# Altium PCB LCD Breakout.PcbDoc
Units mil, origin at the board's own origin, x right, y up, seen from the top; angles counter-clockwise.
Board outline 1225 x 1575 mil, 2 copper layers (Top Layer, Bottom Layer); 11 components, 50 nets, 91 pads, 3 vias.
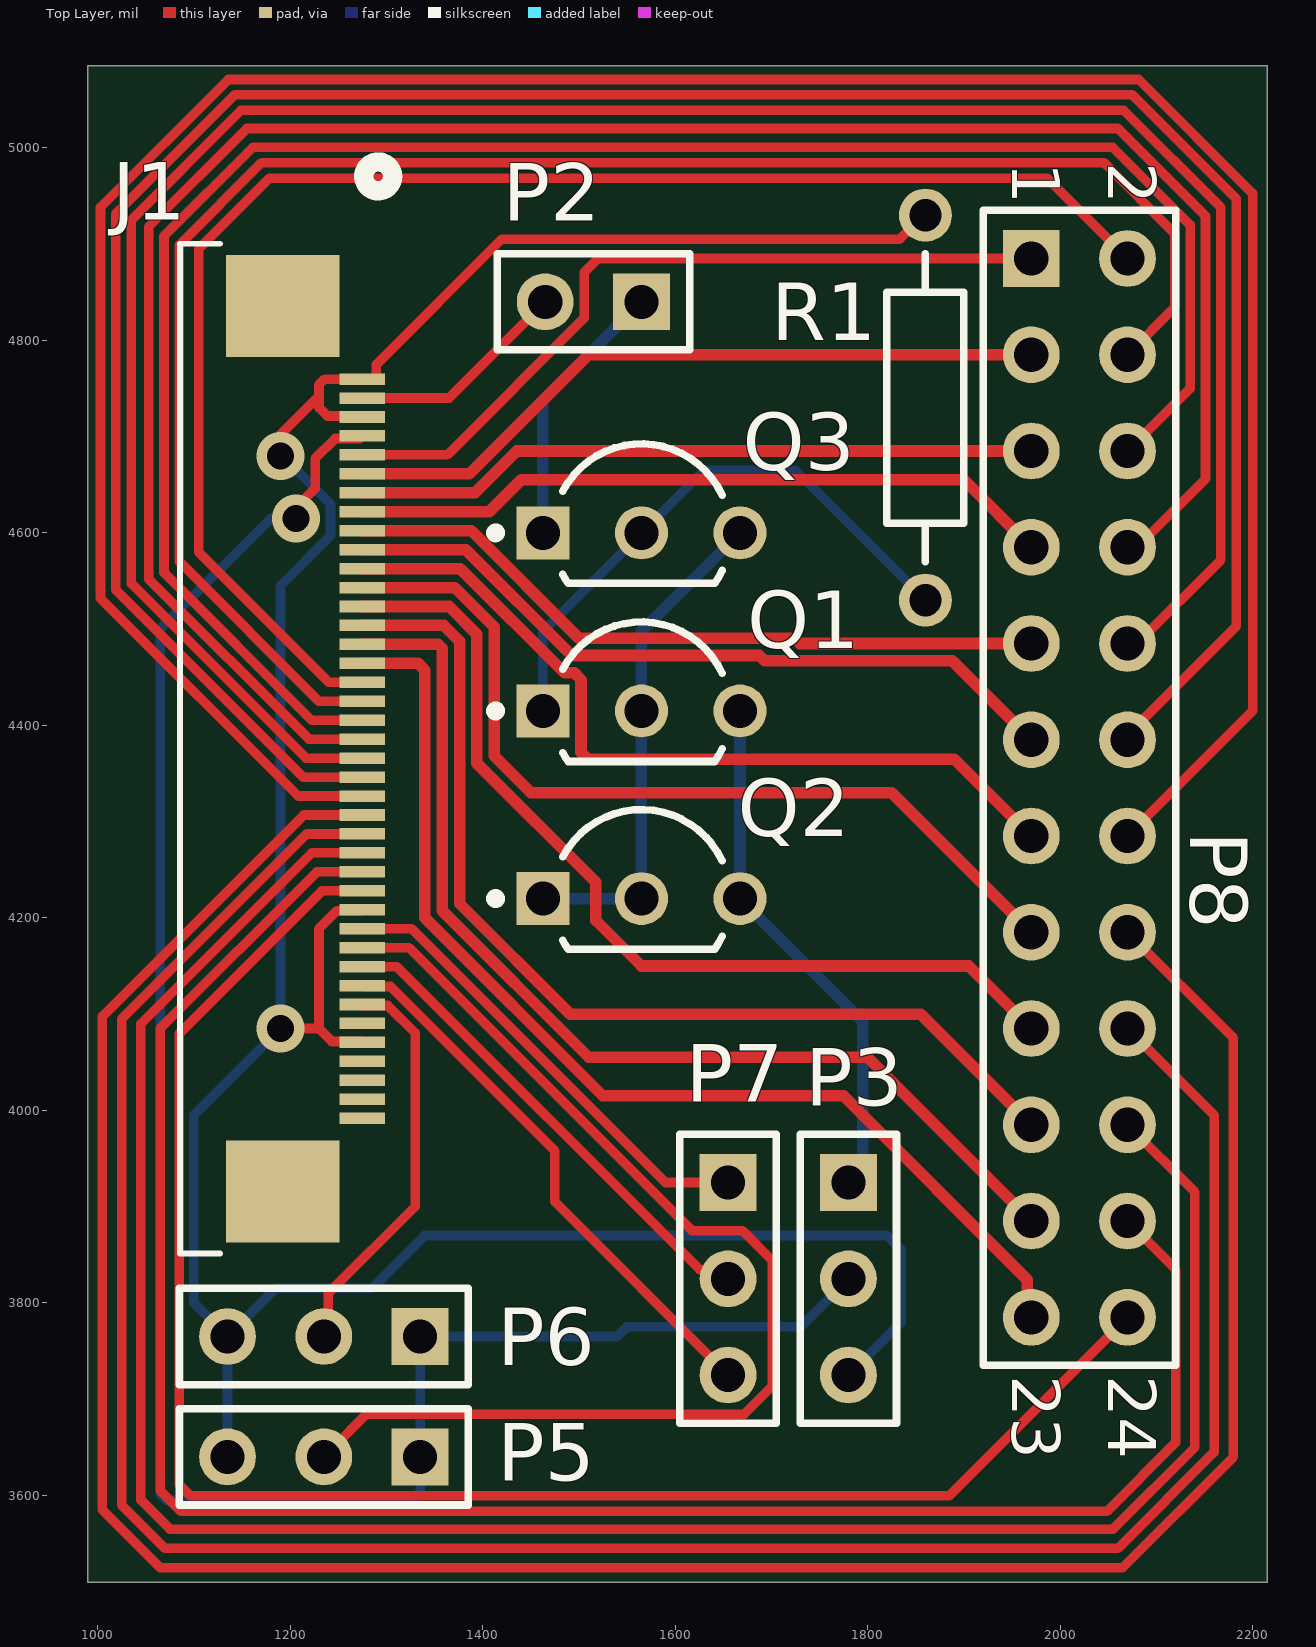
[diagram p0: Top Layer view]
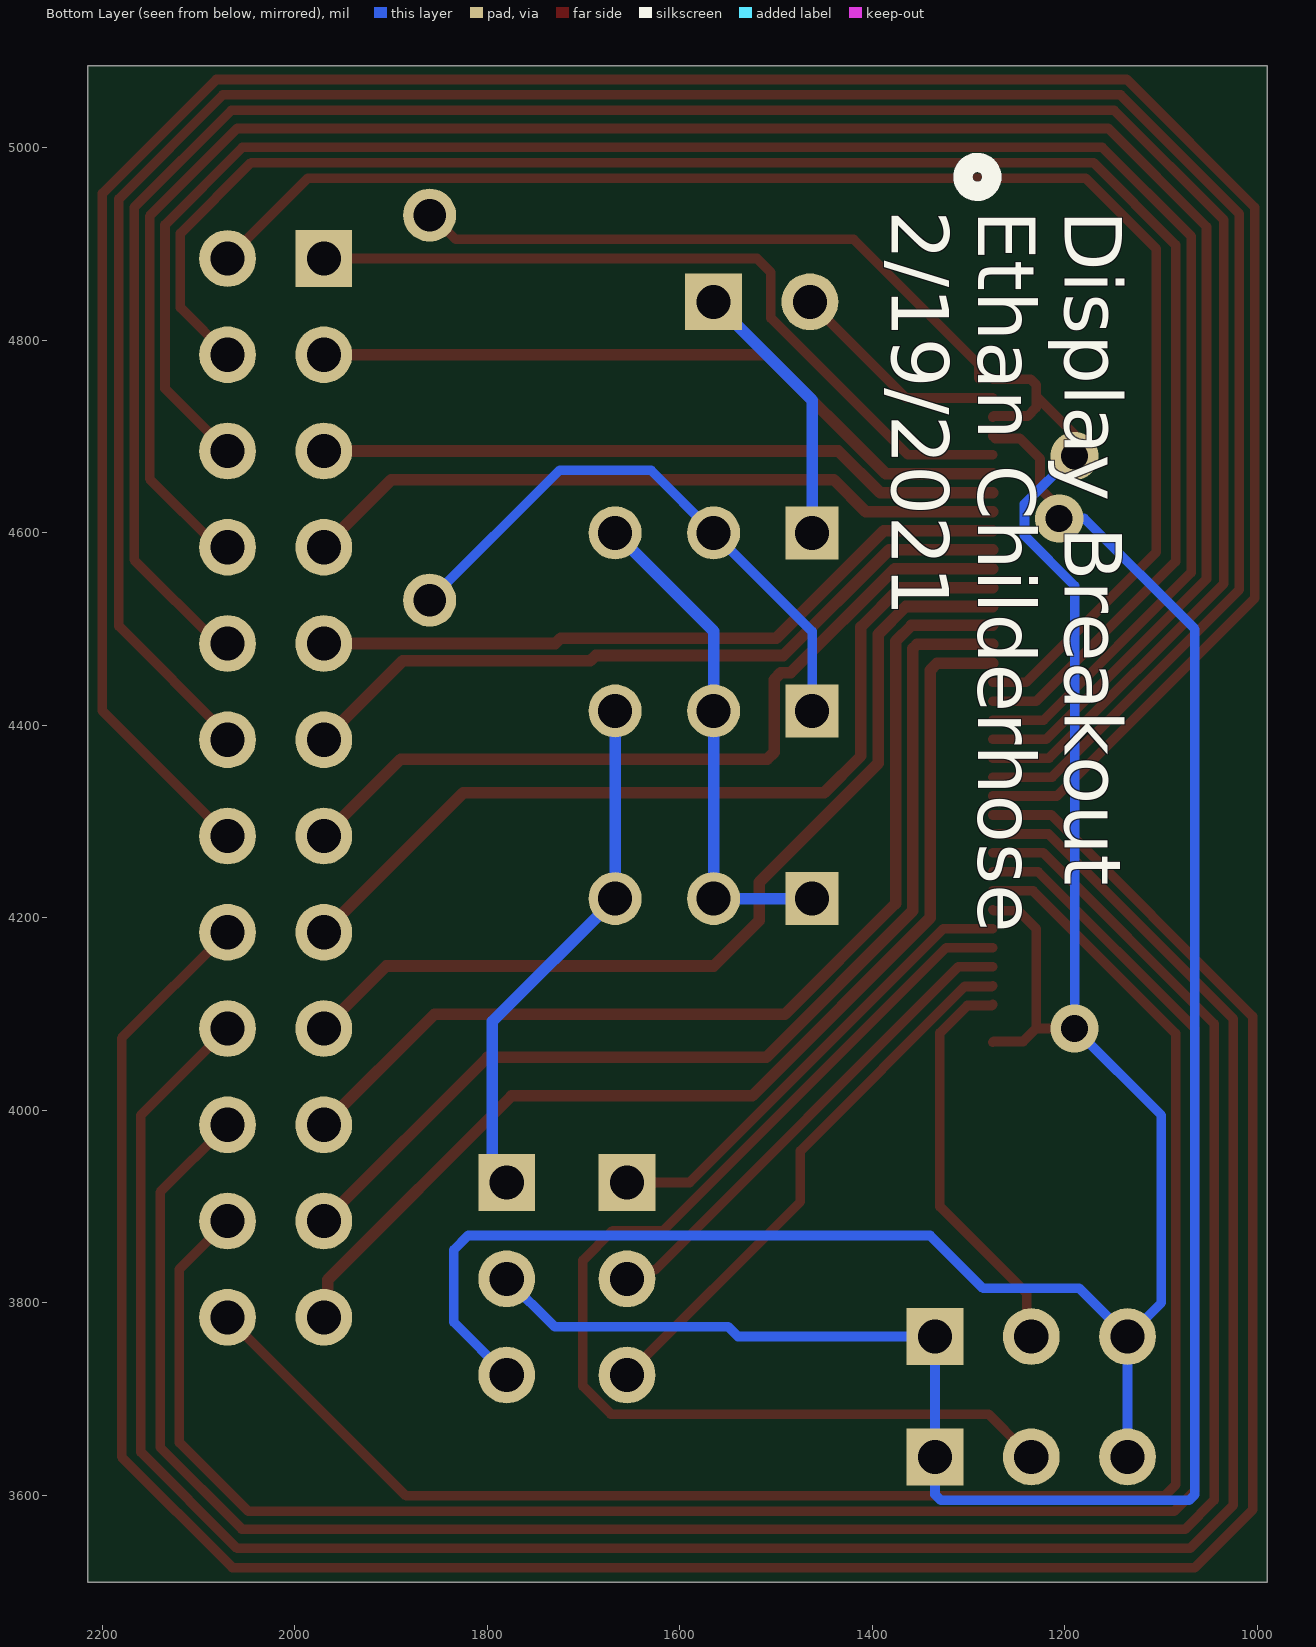
[diagram p1: Bottom Layer view, seen from below]

## Layer stack, top to bottom
Top Solder: solder mask 0.4, Solder Resist, Dk 3.5
Top Layer: signal copper 1.4
Dielectric 1: dielectric 12.6, FR-4, Dk 4.8
Bottom Layer: signal copper 1.4
Bottom Solder: solder mask 0.4, Solder Resist, Dk 3.5

## Board outline
990,3510 2215,3510 2215,5085 990,5085

## Design rules (kind name [scope] priority, off if disabled: settings)
Clearance [All] p1: gap=6 ignorepadtopadclearanceinfootprint=FALSE
PolygonConnect [All] p1: connectstyle=Relief reliefconductorwidth=10 reliefentries=4 polygonreliefangle="90 Angle" airgapwidth=10
RoutingVias [All] p1: holewidth=28 width=50 viastyle="Through Hole" minholewidth=28 minwidth=50 maxholewidth=28 maxwidth=50
SolderMaskExpansion [All] p1: expansion=4 istentingtop=FALSE
Width [All] p1: maxlimit=15 minlimit=7 preferedwidth=10
30 further rules are at their usual default settings.

## Classes and differential pairs
component class "LCD Breakout (4DLCD-43480272)": J1 P2 P3 P6 Q1 Q2 Q3 R1

## Components (designator, comment, footprint, x,y, rotation, side; value= is the part's Value field where it differs from the comment)
J1 "68714014522" CONN40_014522_WRE 1275,4759.73 r270 top
P2 "Header 2" HDR1X2 1565,4840 r180 top
P3 "Header 3" HDR1X3 1780,3925 r270 top
P5 "Header 3" HDR1X3 1335,3640 r180 top
P6 "Header 3" HDR1X3 1335,3765 r180 top
P7 "Header 3" HDR1X3 1655,3925 r270 top
P8 "Header 12X2" HDR2X12 1970,4885 r270 top
Q1 "BC327-40ZL1G" ONSC-TO-92-3-29-11_AM_BL 1565,4415 r0 top
Q2 "BC327-40ZL1G" ONSC-TO-92-3-29-11_AM_BL 1565,4220 r0 top
Q3 "BC327-40ZL1G" ONSC-TO-92-3-29-11_AM_BL 1565,4600 r0 top
R1 "Res2" AXIAL-0.4 1860,4730 r270 top value=82

## Footprints (in the part's own frame and the unit in brackets; to place one, negate y for a bottom-side part, rotate by r counter-clockwise, add the part's x,y. Pads: shape width x height; smd on the part's side, far side on the other; paste and mask are expansions set on the pad)
AXIAL-0.4 [mm] "Axial Device, Thru-Hole; 2 Leads; 0.4 in Pin Spacing"
  round 1.4 hole 0.85: 1(-5.08,0) 2(5.08,0)
  silkscreen extent -4.06,-1.02 4.06,1.02
CONN40_014522_WRE [mil]
  rect 12x47 smd paste+0 mask+0: 1(0,0) 2(19.69,0) 3(39.38,0) 4(59.07,0) 5(78.76,0) 6(98.45,0) 7(118.14,0) 8(137.83,0) 9(157.52,0) 10(177.21,0) 11(196.9,0) 12(216.59,0) 13(236.28,0) 14(255.97,0) 15(275.66,0) 16(295.35,0) 17(315.04,0) 18(334.73,0) 19(354.42,0) 20(374.11,0) 21(393.8,0) 22(413.49,0) 23(433.18,0) 24(452.87,0) 25(472.56,0) 26(492.25,0) 27(511.94,0) 28(531.63,0) 29(551.32,0) 30(571.01,0) 31(590.7,0) 32(610.39,0) 33(630.08,0) 34(649.77,0) 35(669.46,0) 36(689.15,0) 37(708.84,0) 38(728.53,0) 39(748.22,0) 40(767.91,0)
  rect 106x118 smd: 41(-76.12,-82.5) 42(844.03,-82.5)
  silkscreen extent -226,-190 908,31, body extent 0,0 10,10, height 10
HDR1X2 [mm] "Connector; Header; 2 Position"
  rect 1.5x1.5 hole 0.9: 1(0,0)
  round 1.5 hole 0.9: 2(2.54,0)
  silkscreen extent -1.27,-1.27 3.81,1.27
HDR1X3 [mm] "Connector; Header; 3 Position"
  rect 1.5x1.5 hole 0.9: 1(0,0)
  round 1.5 hole 0.9: 2(2.54,0) 3(5.08,0)
  silkscreen extent -1.27,-1.27 6.35,1.27
HDR2X12 [mm] "Connector; Header; 12x2 Position"
  rect 1.5x1.5 hole 0.9: 1(0,0)
  round 1.5 hole 0.9: 2(0,2.54) 3(2.54,0) 4(2.54,2.54) 5(5.08,0) 6(5.08,2.54) 7(7.62,0) 8(7.62,2.54) 9(10.16,0) 10(10.16,2.54) 11(12.7,0) 12(12.7,2.54) 13(15.24,0) 14(15.24,2.54) 15(17.78,0) 16(17.78,2.54) 17(20.32,0) 18(20.32,2.54) 19(22.86,0) 20(22.86,2.54) 21(25.4,0) 22(25.4,2.54) 23(27.94,0) 24(27.94,2.54)
  silkscreen extent -1.27,-1.27 29.21,3.81
ONSC-TO-92-3-29-11_AM_BL [mm] "TO, 3-Leads, Body Dia 4.7mm, Pitch 2.6mm"
  rect 1.4x1.4 hole 0.9: 1(-2.6,0)
  round 1.4 hole 0.9: 2(0,0) 3(2.6,0)
  silkscreen extent -3.97,-1.34 2.13,2.35, body extent -2.84,-1.34 2.84,2.35, height 5.33

## Part data
J1: "No Description Available", Built_By=EMA_Matt, Copyright="Copyright (C) 2018 Accelerated Designs. All rights reserved", Datasheet=https://www.we-online.de/katalog/datasheet/6871xx14522.pdf, Manufacturer_Part_Number=68714014522, RefDes=RefDes, SourceLibrary=Add_to_database_2020-11-03, Type=DEV, Vendor="Wurth Electronics"
P2: "Header, 2-Pin", LatestRevisionDate=17-Jul-2002, LatestRevisionNote="Re-released for DXP Platform.", Publisher="Altium Limited"
P3 P5 P6 P7: "Header, 3-Pin", LatestRevisionDate=17-Jul-2002, LatestRevisionNote="Re-released for DXP Platform.", Publisher="Altium Limited"
P8: "Header, 12-Pin, Dual row", LatestRevisionDate=17-Jul-2002, LatestRevisionNote="Re-released for DXP Platform.", Publisher="Altium Limited"
Q1 Q2 Q3: library part CMP-1048-01589-1, "Amplifier Transistor, PNP Silicon, 3-Pin TO-92, Pb-Free, Ammo Box", Manufacturer="On Semiconductor", ComponentLink1Description="Manufacturer URL", ComponentLink1URL=http://www.onsemi.com/, ComponentLink2Description=Datasheet, ComponentLink2URL=http://www.onsemi.com/pub_link/Collateral/BC327-D.PDF, ComponentLink3Description="Package Specification", ComponentLink3URL=http://www.onsemi.com/pub_link/Collateral/MAC97-D.PDF, DatasheetVersion="Rev. 6", IC Continuous (A)=-0.8, Mounting Technology="Through Hole", PackageDescription="3-Pin Transistor Outline, Body 4.825 x 3.685 mm, Pitch 1.27 mm", PackageReference=TO-92-3-29-11_AM_BL, PackageVersion="Rev. AM", Packing="Ammo Box", PartNumber=BC327-40ZL1G, Polarity=PNP, RoHS=TRUE
R1: library part Res1, "Resistor", LatestRevisionDate=17-Jul-2002, LatestRevisionNote="Re-released for DXP Platform.", PackageDescription="Axial Device, Thru-Hole; 2 Leads; 0.4 in Pin Spacing", PackageReference=AXIAL-0.4, Published=8-Jun-2000, Publisher="Altium Limited"

## Via types
v1: diameter 50, hole 28, Top Layer to Bottom Layer, 3 vias

## Nets (pads, with @x,y where several pads share a name; then routed paths per layer and width w, separated by ;. In a path a pad name is that pad's centre, name@x,y a point inside that pad or via, vN(x,y) a via of type N, cw(c..) or ccw(c..) an arc to the next point about the centre after c; other vN are vias at no path point)
1v: 
1v2: 
3v3: J1.4 P3.2 P5.1 P6.1 | length 2134.9
  Top Layer w10: v1(1206,4615) 1206,4625.82 1226,4645.82 1226,4677.03 1246.94,4697.97 1272.31,4697.97 J1.4 ; P3.2@1773.51,3818.51 P3.2
  Bottom Layer w10: v1(1206,4615) 1180,4615 1065,4500 1065,3600.86 1070.86,3595 1329.14,3595 1335,3600.86 P5.1 P6.1 1539.76,3765 1549.76,3775 1730,3775 P3.2
5v: P3.1 Q1.3 Q2.3 | length 549.1
  Bottom Layer w12: Q1.3 Q2.3 1795,4092.36 1795,3940 P3.1
GND: J1.1 J1.3 J1.29 J1.36 P3.3 P5.3 P6.3 R1.1 | length 3142.9
  Top Layer w10: P6.3 P6.3@1135,3767.97 ; v1(1190,4085) 1230,4085 ; v1(1190,4680) 1190,4701.94 1230,4741.94 ; J1.36 1274,4071.58 1243.42,4071.58 1230,4085 ; J1.29 1274,4207.41 1248.63,4207.41 1230,4188.78 1230,4085 ; J1.3 1274,4721.35 1238.65,4721.35 1230,4730 1230,4741.94 ; J1.1 1235.86,4759.73 1230,4753.87 1230,4741.94 ; J1.1@1288.87,4760 1289.6,4760.73 1289.6,4774.87 1419.73,4905 1833.1,4905 1858.1,4930 R1.1 ; P3.3@1775,3725 P3.3
  Bottom Layer w10: P5.3 P6.3 ; v1(1190,4680) 1191.91,4680 1242,4629.91 1242,4597 1190,4545 v1(1190,4085) 1100,3995 1100,3800 P6.3 ; P3.3 1835,3780 1835,3855 1820,3870 1340,3870 1285,3815 1185,3815 P6.3
NetJ1_2: J1.2 P2.2 | length 231.4
  Top Layer w10: J1.2 1365.04,4740.04 P2.2
NetJ1_5: J1.5 P8.1 | length 807.2
  Top Layer w10: J1.5 1363.28,4680.97 1505.53,4823.21 1505.53,4870.53 1520,4885 P8.1
NetJ1_6: J1.6 P8.3 | length 746.2
  Top Layer w12: J1.6 1386.28,4661.28 1510,4785 P8.3
NetJ1_7: J1.7 P8.5 | length 713
  Top Layer w12: J1.7 1392.05,4641.59 1435.46,4685 P8.5
NetJ1_8: J1.8 P8.7 | length 737.7
  Top Layer w12: J1.8 1406.9,4621.9 1440,4655 1900,4655 P8.7
NetJ1_9: J1.9 P8.9 | length 743.5
  Top Layer w12: J1.9 1388.34,4602.21 1499.99,4490.56 1724.07,4490.56 1729.63,4485 P8.9
NetJ1_10: J1.10 P8.11 | length 776.8
  Top Layer w12: J1.10 1382.57,4582.52 1492.53,4472.56 1687.49,4472.56 1693.05,4467 1888,4467 P8.11
NetJ1_11: J1.11 P8.13 | length 854.3
  Top Layer w12: J1.11 1376.81,4562.83 1485.08,4454.56 1495.17,4454.56 1502.2,4447.53 1502.2,4372.03 1509.23,4365 1890,4365 P8.13
NetJ1_12: J1.12 P8.15 | length 921.8
  Top Layer w12: J1.12 1371.04,4543.14 1412,4502.18 1412,4368.18 1450.18,4330 1825,4330 P8.15
NetJ1_13: J1.13 P8.17 | length 978.4
  Top Layer w12: J1.13 1365.28,4523.45 1394,4494.73 1394,4360.73 1517.74,4236.98 1517.74,4197.26 1565,4150 1905,4150 P8.17
NetJ1_14: J1.14 P8.19 | length 1069.4
  Top Layer w12: J1.14 1359.51,4503.76 1376,4487.27 1376,4214.91 1490.91,4100 1855,4100 P8.19
NetJ1_15: J1.15 P8.21 | length 1102.7
  Top Layer w12: J1.15 1353.74,4484.07 1358,4479.81 1358,4207.46 1510.46,4055 1800,4055 P8.21
NetJ1_16: J1.16 P8.23 | length 1147.7
  Top Layer w12: J1.16 1332.97,4464.38 1340,4457.35 1340,4200 1525,4015 1775,4015 1965.89,3824.11 1965.89,3789.11 P8.23
NetJ1_17: J1.17 P8.2 | length 1571.1
  Top Layer w10: J1.17 1240.31,4444.69 1105,4580 1105,4895 1178.56,4968.56 1986.44,4968.56 P8.2
NetJ1_18: J1.18 P8.4 | length 1825.3
  Top Layer w10: J1.18 1230,4425 1085,4570 1085,4899.14 1170.42,4984.56 2045.44,4984.56 2119,4911 2119,4834 P8.4
NetJ1_19: J1.19 P8.6 | length 2018.6
  Top Layer w10: J1.19 1222.32,4405.31 1069,4558.63 1069,4908.14 1161.42,5000.56 2054.44,5000.56 2135,4920 2135,4750 P8.6
NetJ1_20: J1.20 P8.8 | length 2218.3
  Top Layer w10: J1.20 1219.38,4385.62 1053,4552 1053,4918 1155,5020 2060,5020 2151,4929 2151,4656 2080,4585 P8.8
NetJ1_21: J1.21 P8.10 | length 2412.9
  Top Layer w10: J1.21 1216.44,4365.93 1035,4547.37 1035,4925 1149,5039 2066,5039 2167,4938 2167,4572 2080,4485 P8.10
NetJ1_22: J1.22 P8.12 | length 2596.1
  Top Layer w10: J1.22 1213.51,4346.24 1019,4540.75 1019,4931.63 1142.37,5055 2075,5055 2183,4947 2183,4503 2070,4390 P8.12
NetJ1_23: J1.23 P8.14 | length 2785.8
  Top Layer w10: J1.23 1208.45,4326.55 1003,4532 1003,4938.25 1135.75,5071 2081.63,5071 2200,4952.63 2200,4415 P8.14
NetJ1_24: J1.24 P8.16 | length 2707.3
  Top Layer w10: J1.24 1214.23,4306.86 1005,4097.63 1005,3585 1065,3525 2065,3525 2180,3640 2180,4075 P8.16
NetJ1_25: J1.25 P8.18 | length 2506.9
  Top Layer w10: J1.25 1217.17,4287.17 1025,4095 1025,3590 1070,3545 2060,3545 2160,3645 2160,3995 P8.18
NetJ1_26: J1.26 P8.20 | length 2305.1
  Top Layer w10: J1.26 1222.48,4267.48 1045,4090 1045,3595 1075,3565 2055,3565 2140,3650 2140,3915 P8.20
NetJ1_27: J1.27 P8.22 | length 2101.7
  Top Layer w10: J1.27 1227.79,4247.79 1065,4085 1065,3605 1086.53,3583.47 2048.47,3583.47 2120,3655 2120,3835 P8.22
NetJ1_28: J1.28 P8.24 | length 1787.1
  Top Layer w10: J1.28 1233.1,4228.1 1085,4080 1085,3610.86 1096.39,3599.47 1884.47,3599.47 P8.24
NetJ1_30: J1.30 P7.1 | length 489.2
  Top Layer w10: J1.30 1326.28,4188.72 1590,3925 P7.1
NetJ1_31: J1.31 P5.2 | length 1193.2
  Top Layer w10: P5.2 1245,3640 1245,3650 1279.47,3684.47 1671.79,3684.47 1700.86,3713.54 1700.86,3844.14 1670,3875 1617.37,3875 1323.34,4169.03 J1.31
NetJ1_32: J1.32 P7.2 | length 514.3
  Top Layer w10: J1.32 1310.66,4149.34 1625.61,3834.39 1645.61,3834.39 P7.2
NetJ1_33: J1.33 P7.3 | length 578.6
  Top Layer w10: J1.33 1276,4128.65 1304.3,4128.65 1474.96,3957.99 1474.96,3905.04 P7.3
NetJ1_34: J1.34 P6.2 | length 422
  Top Layer w10: P6.2 1239.53,3769.53 1239.53,3809.53 1330,3900 1330,4080.33 1301.37,4108.96 1276,4108.96 J1.34
NetJ_30: 
NetJ_197: 
NetJ_198: 
NetJ_199: 
NetJ_200: 
NetJ_201: 
NetJ_202: 
NetP2_1: P2.1 Q3.1 | length 282.4
  Bottom Layer w12: Q3.1 1462.64,4737.64 P2.1
NetQ1_1: Q1.1 Q3.2 R1.2 | length 605.2
  Bottom Layer w10: Q1.1 1462.64,4497.64 Q3.2 1630,4665 1725,4665 R1.2
NetQ1_2: Q1.2 Q2.1 Q2.2 Q3.3 | length 524.8
  Bottom Layer w12: Q2.1 Q2.2 Q1.2 1565,4497.64 Q3.3
VCC: 
Vdd: 
Vrefca: 
Vrefdq: 
Vtt: 
pads on no net: J1.35 J1.37 J1.38 J1.39 J1.40 J1.41 J1.42

## Silkscreen, mask and mechanical layers (free items; w line width, h text height)
Bottom Overlay:
  text "Display Breakout / Ethan Childerhose / 2/19/2021" at 1380,4935 h60 r90

## Text inside footprints (layer, text, board x,y; h text height)
J1: Mechanical 7 "0.02in/0.5mm" at 1356.5,4652.6 h25 r270; Mechanical 7 "0.1in/2.54mm" at 1581.5,4450.77 h25 r270; Mechanical 7 "1.039in/26.391mm" at 1681.5,4475.77 h25 r270; Mechanical 7 "0in/0mm" at 1158.5,3736.28 h25 r270
P8: Top Overlay "1" at 1950,4985 h50 r270; Top Overlay "2" at 2050,4985 h50 r270; Top Overlay "23" at 1950,3725 h50 r270; Top Overlay "24" at 2050,3725 h50 r270